# EAGLE board ludusProtoShield_Panel_v10 (EAGLE 7.2.0), part 1 of 3
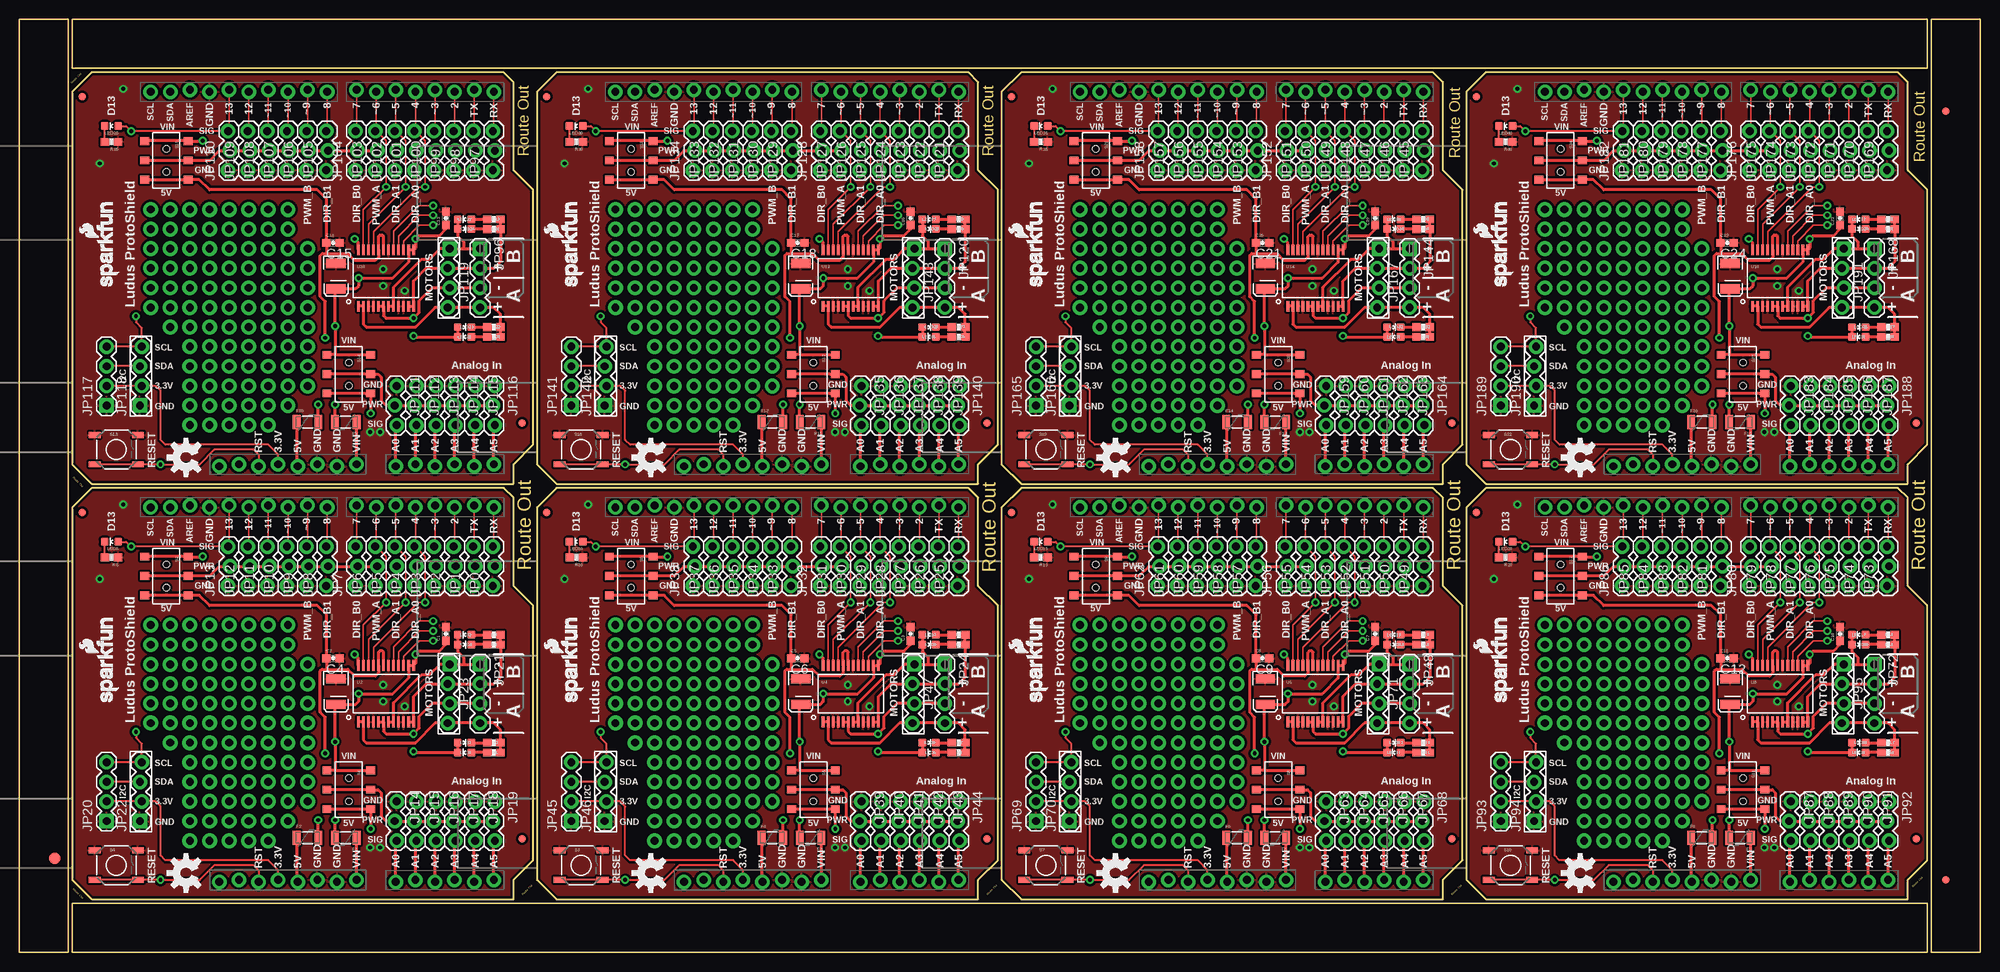
[diagram p0: board, top side]
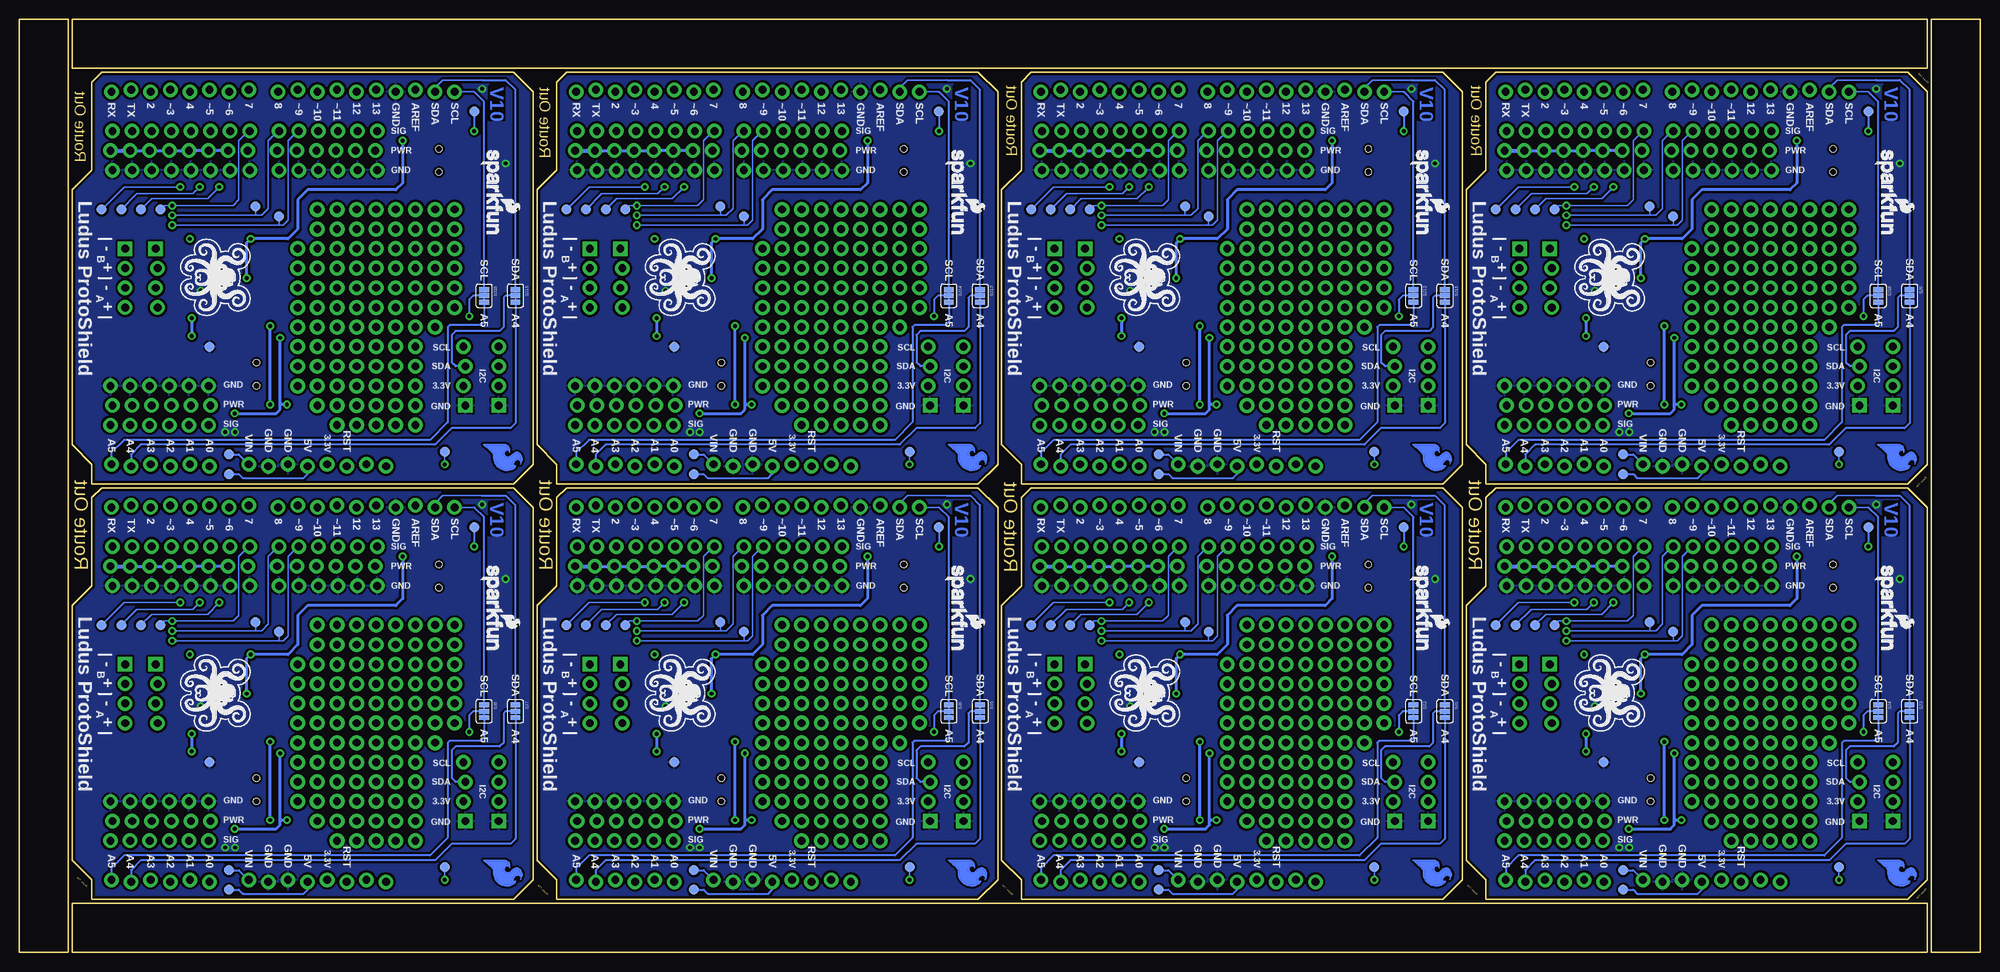
[diagram p1: board, bottom side, seen from below]

Size 254 x 120.9 mm. Coordinates in mm from the lower left corner, seen from the top.
Outline: 6.86,57.66 6.86,9.4 9.4,6.86 64.01,6.86 64.01,9.4 66.55,11.94 66.55,44.96 64.01,47.5 64.01,58.93 62.74,60.2 9.4,60.2 6.86,57.66
Outline: 67.06,57.66 67.06,9.4 69.6,6.86 124.21,6.86 124.21,9.4 126.75,11.94 126.75,44.96 124.21,47.5 124.21,58.93 122.94,60.2 69.6,60.2 67.06,57.66
Outline: 127.25,57.66 127.25,9.4 129.79,6.86 184.4,6.86 184.4,9.4 186.94,11.94 186.94,44.96 184.4,47.5 184.4,58.93 183.13,60.2 129.79,60.2 127.25,57.66
Outline: 187.45,57.66 187.45,9.4 189.99,6.86 244.6,6.86 244.6,9.4 247.14,11.94 247.14,44.96 244.6,47.5 244.6,58.93 243.33,60.2 189.99,60.2 187.45,57.66
Outline: 6.86,111.51 6.86,63.25 9.4,60.71 64.01,60.71 64.01,63.25 66.55,65.79 66.55,98.81 64.01,101.35 64.01,112.78 62.74,114.05 9.4,114.05 6.86,111.51
Outline: 67.06,111.51 67.06,63.25 69.6,60.71 124.21,60.71 124.21,63.25 126.75,65.79 126.75,98.81 124.21,101.35 124.21,112.78 122.94,114.05 69.6,114.05 67.06,111.51
Outline: 127.25,111.51 127.25,63.25 129.79,60.71 184.4,60.71 184.4,63.25 186.94,65.79 186.94,98.81 184.4,101.35 184.4,112.78 183.13,114.05 129.79,114.05 127.25,111.51
Outline: 187.45,111.51 187.45,63.25 189.99,60.71 244.6,60.71 244.6,63.25 247.14,65.79 247.14,98.81 244.6,101.35 244.6,112.78 243.33,114.05 189.99,114.05 187.45,111.51
Outline: 6.35,0 6.35,120.9 0,120.9 0,0 6.35,0
Outline: 6.86,6.35 6.86,0 247.14,0 247.14,6.35 6.86,6.35
Outline: 254,0 254,120.9 247.65,120.9 247.65,0 254,0
Outline: 247.14,114.55 247.14,120.9 6.86,120.9 6.86,114.55 247.14,114.55
Copper layers (1*16): Top 0.035mm / dielectric 1.5mm / Bottom 0.035mm
Design rules "SparkFun-2-layer": minimum track width 7mil, minimum drill 15mil, track to track 8mil, track to pad 8mil, pad to pad 8mil, via to via 8mil, smd to smd 8mil, copper to edge 8mil, drill to drill 8mil, minimum pad ring 12mil, minimum via ring 10mil, stop-mask expansion 4mil, vias tented up to drill 20mil, thermal gap 10mil
Net classes: 1 power: width 0.61 mm

## Footprints (pad centres in the part's own frame; a part is rotated, then mirrored left to right if it is on the bottom)
0603-CAP = smd 1.1 x 1: 1 -0.85,0; 2 0.85,0
EIA3528 = smd 1.2 x 2.5: A 1.65,0; C -1.65,0
FIDUCIAL-1.5X3 = smd 1.5 x 1.5: 1 0,0
FIDUCIAL-1X2 = smd 1 x 1: 1 0,0
PTC-1206 = smd 1 x 1.8: 1 -1.4,0; 2 1.4,0
1X03_LOCK = drill 1.016 pad 1.88: 1 0,0.127; 2 2.54,-0.127; 3 5.08,0.127
1X04 = drill 1.016 pad 1.88 square: 1 0,0 | drill 1.016 pad 1.88: 2 2.54,0; 3 5.08,0; 4 7.62,0
1X04_LOCK = drill 1.016 pad 1.88 square: 1 0,0.127 | drill 1.016 pad 1.88: 2 2.54,-0.127; 3 5.08,0.127; 4 7.62,-0.127
LED-0603 = smd 1 x 1: A 0,-0.877; C 0,0.877
0603-RES = smd 1.1 x 1: 1 -0.85,0; 2 0.85,0
AYZ0202 = smd 1 x 1.15: 1 -2.5,2.825; 2 0,2.825; 3 2.5,2.825; 4 -2.5,-2.825; 5 0,-2.825; 6 2.5,-2.825 | hole 0.85: 1.5,0; -1.5,0
TACTILE-SWITCH-SMD = smd 1.524 x 0.762: 1 -2.794,1.905; 2 2.794,1.905; 3 -2.794,-1.905; 4 2.794,-1.905
PAD-JUMPER-3-3OF3_NC_BY_TRACE_YES_SILK_FULL_BOX = smd 0.635 x 1.27: 1 -0.813,0; 2 0,0; 3 0.813,0
PAD.03X.05 = smd 1.27 x 1.27: P$1 0,0
UNO_R3_SHIELD_NOLABELS_LOCK = drill 1.016 pad 1.88: 3.3V 50.8,26.67; 5V 51.054,29.21; A0 51.054,41.91; A1 50.8,44.45; A2 51.054,46.99; A3 50.8,49.53; A4 51.054,52.07; A5 50.8,54.61; AREF 2.286,15.24; D2 2.54,49.53; D3 2.286,46.99; D4 2.54,44.45; D5 2.286,41.91; D6 2.54,39.37; D7 2.286,36.83; D8 2.54,33.02; D9 2.286,30.48; D10 2.54,27.94; D11 2.286,25.4; D12 2.54,22.86; D13 2.286,20.32; GND@0 50.8,31.75; GND@1 51.054,34.29; GND@2 2.54,17.78; IOREF 50.8,21.59; NC 51.054,19.05; RES 51.054,24.13; RX 2.54,54.61; SCL 2.54,10.16; SDA 2.54,12.7; TX 2.286,52.07; VIN 50.8,36.83
SSOP24 = smd 0.348 x 1.397: 1 -3.575,-3.656; 2 -2.925,-3.656; 3 -2.275,-3.656; 4 -1.625,-3.656; 5 -0.975,-3.656; 6 -0.325,-3.656; 7 0.325,-3.656; 8 0.975,-3.656; 9 1.625,-3.656; 10 2.275,-3.656; 11 2.925,-3.656; 12 3.575,-3.656; 13 3.575,3.656; 14 2.925,3.656; 15 2.275,3.656; 16 1.625,3.656; 17 0.975,3.656; 18 0.325,3.656; 19 -0.325,3.656; 20 -0.975,3.656; 21 -1.625,3.656; 22 -2.275,3.656; 23 -2.925,3.656; 24 -3.575,3.656

## Placement (x,y rotation side)
C1  0.1uF  [0603-CAP]  55.24,41.27 90 top
C2  0.1uF  [0603-CAP]  40.64,38.1 0 top
C3  0.1uF  [0603-CAP]  115.44,41.27 90 top
C4  10uf , 20V  [EIA3528]  41.02,33.78 270 top
C5  0.1uF  [0603-CAP]  100.84,38.1 0 top
C6  10uf , 20V  [EIA3528]  101.22,33.78 270 top
C7  0.1uF  [0603-CAP]  175.64,41.27 90 top
C8  0.1uF  [0603-CAP]  161.04,38.1 0 top
C9  10uf , 20V  [EIA3528]  161.42,33.78 270 top
C10  0.1uF  [0603-CAP]  235.84,41.27 90 top
C11  0.1uF  [0603-CAP]  221.23,38.1 0 top
C12  10uf , 20V  [EIA3528]  221.62,33.78 270 top
C13  0.1uF  [0603-CAP]  55.24,95.12 90 top
C14  0.1uF  [0603-CAP]  40.64,91.95 0 top
C15  10uf , 20V  [EIA3528]  41.02,87.63 270 top
C16  0.1uF  [0603-CAP]  115.44,95.12 90 top
C17  0.1uF  [0603-CAP]  100.84,91.95 0 top
C18  10uf , 20V  [EIA3528]  101.22,87.63 270 top
C19  0.1uF  [0603-CAP]  175.64,95.12 90 top
C20  0.1uF  [0603-CAP]  161.04,91.95 0 top
C21  10uf , 20V  [EIA3528]  161.42,87.63 270 top
C22  0.1uF  [0603-CAP]  235.84,95.12 90 top
C23  0.1uF  [0603-CAP]  221.23,91.95 0 top
C24  10uf , 20V  [EIA3528]  221.62,87.63 270 top
E$1  [FIDUCIAL-1.5X3]  4.57,12.19 0 top
E$4  [FIDUCIAL-1X2]  249.56,9.4 0 top
E$5  [FIDUCIAL-1X2]  249.56,108.97 180 top
F1  [PTC-1206]  42.29,14.86 180 top
F2  [PTC-1206]  37.34,14.86 0 top
F3  [PTC-1206]  102.49,14.86 180 top
F4  [PTC-1206]  97.54,14.86 0 top
F5  [PTC-1206]  162.69,14.86 180 top
F6  [PTC-1206]  157.73,14.86 0 top
F7  [PTC-1206]  222.88,14.86 180 top
F8  [PTC-1206]  217.93,14.86 0 top
F9  [PTC-1206]  42.29,68.71 180 top
F10  [PTC-1206]  37.34,68.71 0 top
F11  [PTC-1206]  102.49,68.71 180 top
F12  [PTC-1206]  97.54,68.71 0 top
F13  [PTC-1206]  162.69,68.71 180 top
F14  [PTC-1206]  157.73,68.71 0 top
F15  [PTC-1206]  222.88,68.71 180 top
F16  [PTC-1206]  217.93,68.71 0 top
FID1  FIDUCIAL1X2  [FIDUCIAL-1X2]  8.13,57.02 0 top
FID2  FIDUCIAL1X2  [FIDUCIAL-1X2]  65.15,14.73 0 top
FID3  FIDUCIAL1X2  [FIDUCIAL-1X2]  68.33,57.02 0 top
FID4  FIDUCIAL1X2  [FIDUCIAL-1X2]  125.35,14.73 0 top
FID5  FIDUCIAL1X2  [FIDUCIAL-1X2]  128.52,57.02 0 top
FID6  FIDUCIAL1X2  [FIDUCIAL-1X2]  185.55,14.73 0 top
FID7  FIDUCIAL1X2  [FIDUCIAL-1X2]  188.72,57.02 0 top
FID8  FIDUCIAL1X2  [FIDUCIAL-1X2]  245.75,14.73 0 top
FID9  FIDUCIAL1X2  [FIDUCIAL-1X2]  8.13,110.87 0 top
FID10  FIDUCIAL1X2  [FIDUCIAL-1X2]  65.15,68.58 0 top
FID11  FIDUCIAL1X2  [FIDUCIAL-1X2]  68.33,110.87 0 top
FID12  FIDUCIAL1X2  [FIDUCIAL-1X2]  125.35,68.58 0 top
FID13  FIDUCIAL1X2  [FIDUCIAL-1X2]  128.52,110.87 0 top
FID14  FIDUCIAL1X2  [FIDUCIAL-1X2]  185.55,68.58 0 top
FID15  FIDUCIAL1X2  [FIDUCIAL-1X2]  188.72,110.87 0 top
FID16  FIDUCIAL1X2  [FIDUCIAL-1X2]  245.75,68.58 0 top
JP0  D0  [1X03_LOCK]  61.47,47.5 90 top
JP1  D1  [1X03_LOCK]  58.93,47.5 90 top
JP2  D2  [1X03_LOCK]  56.39,47.5 90 top
JP3  D3  [1X03_LOCK]  53.85,47.5 90 top
JP4  D4  [1X03_LOCK]  51.31,47.5 90 top
JP5  D5  [1X03_LOCK]  48.77,47.5 90 top
JP6  D6  [1X03_LOCK]  46.23,47.5 90 top
JP7  D7  [1X03_LOCK]  43.69,47.5 90 top
JP8  D8  [1X03_LOCK]  39.88,47.5 90 top
JP9  D9  [1X03_LOCK]  37.34,47.5 90 top
JP10  D10  [1X03_LOCK]  34.8,47.5 90 top
JP11  D11  [1X03_LOCK]  32.26,47.5 90 top
JP12  D12  [1X03_LOCK]  29.72,47.5 90 top
JP13  D13  [1X03_LOCK]  27.18,47.5 90 top
JP14  A0  [1X03_LOCK]  48.77,19.56 270 top
JP15  A1  [1X03_LOCK]  51.31,19.56 270 top
JP16  A2  [1X03_LOCK]  53.85,19.56 270 top
JP17  A3  [1X03_LOCK]  56.39,19.56 270 top
JP18  A4  [1X03_LOCK]  58.93,19.56 270 top
JP19  A5  [1X03_LOCK]  61.47,19.56 270 top
JP20  [1X04]  11.3,17.02 90 top
JP21  [1X04]  59.69,37.34 270 top
JP22  [1X04_LOCK]  15.75,17.02 90 top
JP23  [1X04_LOCK]  55.63,37.34 270 top
JP24  [1X04]  119.89,37.34 270 top
JP25  D0  [1X03_LOCK]  121.67,47.5 90 top
JP26  D1  [1X03_LOCK]  119.13,47.5 90 top
JP27  D2  [1X03_LOCK]  116.59,47.5 90 top
JP28  D3  [1X03_LOCK]  114.05,47.5 90 top
JP29  D4  [1X03_LOCK]  111.51,47.5 90 top
JP30  D5  [1X03_LOCK]  108.97,47.5 90 top
JP31  D6  [1X03_LOCK]  106.43,47.5 90 top
JP32  D7  [1X03_LOCK]  103.89,47.5 90 top
JP33  D8  [1X03_LOCK]  100.08,47.5 90 top
JP34  D9  [1X03_LOCK]  97.54,47.5 90 top
JP35  D10  [1X03_LOCK]  95,47.5 90 top
JP36  D11  [1X03_LOCK]  92.46,47.5 90 top
JP37  D12  [1X03_LOCK]  89.92,47.5 90 top
JP38  D13  [1X03_LOCK]  87.38,47.5 90 top
JP39  A0  [1X03_LOCK]  108.97,19.56 270 top
JP40  A1  [1X03_LOCK]  111.51,19.56 270 top
JP41  A2  [1X03_LOCK]  114.05,19.56 270 top
JP42  A3  [1X03_LOCK]  116.59,19.56 270 top
JP43  A4  [1X03_LOCK]  119.13,19.56 270 top
JP44  A5  [1X03_LOCK]  121.67,19.56 270 top
JP45  [1X04]  71.5,17.02 90 top
JP46  [1X04_LOCK]  75.95,17.02 90 top
JP47  [1X04_LOCK]  115.82,37.34 270 top
JP48  [1X04]  180.09,37.34 270 top
JP49  D0  [1X03_LOCK]  181.86,47.5 90 top
JP50  D1  [1X03_LOCK]  179.32,47.5 90 top
JP51  D2  [1X03_LOCK]  176.78,47.5 90 top
JP52  D3  [1X03_LOCK]  174.24,47.5 90 top
JP53  D4  [1X03_LOCK]  171.7,47.5 90 top
JP54  D5  [1X03_LOCK]  169.16,47.5 90 top
JP55  D6  [1X03_LOCK]  166.62,47.5 90 top
JP56  D7  [1X03_LOCK]  164.08,47.5 90 top
JP57  D8  [1X03_LOCK]  160.27,47.5 90 top
JP58  D9  [1X03_LOCK]  157.73,47.5 90 top
JP59  D10  [1X03_LOCK]  155.19,47.5 90 top
JP60  D11  [1X03_LOCK]  152.65,47.5 90 top
JP61  D12  [1X03_LOCK]  150.11,47.5 90 top
JP62  D13  [1X03_LOCK]  147.57,47.5 90 top
JP63  A0  [1X03_LOCK]  169.16,19.56 270 top
JP64  A1  [1X03_LOCK]  171.7,19.56 270 top
JP65  A2  [1X03_LOCK]  174.24,19.56 270 top
JP66  A3  [1X03_LOCK]  176.78,19.56 270 top
JP67  A4  [1X03_LOCK]  179.32,19.56 270 top
JP68  A5  [1X03_LOCK]  181.86,19.56 270 top
JP69  [1X04]  131.7,17.02 90 top
JP70  [1X04_LOCK]  136.14,17.02 90 top
JP71  [1X04_LOCK]  176.02,37.34 270 top
JP72  [1X04]  240.28,37.34 270 top
JP73  D0  [1X03_LOCK]  242.06,47.5 90 top
JP74  D1  [1X03_LOCK]  239.52,47.5 90 top
JP75  D2  [1X03_LOCK]  236.98,47.5 90 top
JP76  D3  [1X03_LOCK]  234.44,47.5 90 top
JP77  D4  [1X03_LOCK]  231.9,47.5 90 top
JP78  D5  [1X03_LOCK]  229.36,47.5 90 top
JP79  D6  [1X03_LOCK]  226.82,47.5 90 top
JP80  D7  [1X03_LOCK]  224.28,47.5 90 top
JP81  D8  [1X03_LOCK]  220.47,47.5 90 top
JP82  D9  [1X03_LOCK]  217.93,47.5 90 top
JP83  D10  [1X03_LOCK]  215.39,47.5 90 top
JP84  D11  [1X03_LOCK]  212.85,47.5 90 top
JP85  D12  [1X03_LOCK]  210.31,47.5 90 top
JP86  D13  [1X03_LOCK]  207.77,47.5 90 top
JP87  A0  [1X03_LOCK]  229.36,19.56 270 top
JP88  A1  [1X03_LOCK]  231.9,19.56 270 top
JP89  A2  [1X03_LOCK]  234.44,19.56 270 top
JP90  A3  [1X03_LOCK]  236.98,19.56 270 top
JP91  A4  [1X03_LOCK]  239.52,19.56 270 top
JP92  A5  [1X03_LOCK]  242.06,19.56 270 top
JP93  [1X04]  191.9,17.02 90 top
JP94  [1X04_LOCK]  196.34,17.02 90 top
JP95  [1X04_LOCK]  236.22,37.34 270 top
JP96  [1X04]  59.69,91.19 270 top
JP97  D0  [1X03_LOCK]  61.47,101.35 90 top
JP98  D1  [1X03_LOCK]  58.93,101.35 90 top
JP99  D2  [1X03_LOCK]  56.39,101.35 90 top
JP100  D3  [1X03_LOCK]  53.85,101.35 90 top
JP101  D4  [1X03_LOCK]  51.31,101.35 90 top
JP102  D5  [1X03_LOCK]  48.77,101.35 90 top
JP103  D6  [1X03_LOCK]  46.23,101.35 90 top
JP104  D7  [1X03_LOCK]  43.69,101.35 90 top
JP105  D8  [1X03_LOCK]  39.88,101.35 90 top
JP106  D9  [1X03_LOCK]  37.34,101.35 90 top
JP107  D10  [1X03_LOCK]  34.8,101.35 90 top
JP108  D11  [1X03_LOCK]  32.26,101.35 90 top
JP109  D12  [1X03_LOCK]  29.72,101.35 90 top
JP110  D13  [1X03_LOCK]  27.18,101.35 90 top
JP111  A0  [1X03_LOCK]  48.77,73.41 270 top
JP112  A1  [1X03_LOCK]  51.31,73.41 270 top
JP113  A2  [1X03_LOCK]  53.85,73.41 270 top
JP114  A3  [1X03_LOCK]  56.39,73.41 270 top
JP115  A4  [1X03_LOCK]  58.93,73.41 270 top
JP116  A5  [1X03_LOCK]  61.47,73.41 270 top
JP117  [1X04]  11.3,70.87 90 top
JP118  [1X04_LOCK]  15.75,70.87 90 top
JP119  [1X04_LOCK]  55.63,91.19 270 top
JP120  [1X04]  119.89,91.19 270 top
JP121  D0  [1X03_LOCK]  121.67,101.35 90 top
JP122  D1  [1X03_LOCK]  119.13,101.35 90 top
JP123  D2  [1X03_LOCK]  116.59,101.35 90 top
JP124  D3  [1X03_LOCK]  114.05,101.35 90 top
JP125  D4  [1X03_LOCK]  111.51,101.35 90 top
JP126  D5  [1X03_LOCK]  108.97,101.35 90 top
JP127  D6  [1X03_LOCK]  106.43,101.35 90 top
JP128  D7  [1X03_LOCK]  103.89,101.35 90 top
JP129  D8  [1X03_LOCK]  100.08,101.35 90 top
JP130  D9  [1X03_LOCK]  97.54,101.35 90 top
JP131  D10  [1X03_LOCK]  95,101.35 90 top
JP132  D11  [1X03_LOCK]  92.46,101.35 90 top
JP133  D12  [1X03_LOCK]  89.92,101.35 90 top
JP134  D13  [1X03_LOCK]  87.38,101.35 90 top
JP135  A0  [1X03_LOCK]  108.97,73.41 270 top
JP136  A1  [1X03_LOCK]  111.51,73.41 270 top
JP137  A2  [1X03_LOCK]  114.05,73.41 270 top
JP138  A3  [1X03_LOCK]  116.59,73.41 270 top
JP139  A4  [1X03_LOCK]  119.13,73.41 270 top
JP140  A5  [1X03_LOCK]  121.67,73.41 270 top
JP141  [1X04]  71.5,70.87 90 top
JP142  [1X04_LOCK]  75.95,70.87 90 top
JP143  [1X04_LOCK]  115.82,91.19 270 top
JP144  [1X04]  180.09,91.19 270 top
JP145  D0  [1X03_LOCK]  181.86,101.35 90 top
JP146  D1  [1X03_LOCK]  179.32,101.35 90 top
JP147  D2  [1X03_LOCK]  176.78,101.35 90 top
JP148  D3  [1X03_LOCK]  174.24,101.35 90 top
JP149  D4  [1X03_LOCK]  171.7,101.35 90 top
JP150  D5  [1X03_LOCK]  169.16,101.35 90 top
JP151  D6  [1X03_LOCK]  166.62,101.35 90 top
JP152  D7  [1X03_LOCK]  164.08,101.35 90 top
JP153  D8  [1X03_LOCK]  160.27,101.35 90 top
JP154  D9  [1X03_LOCK]  157.73,101.35 90 top
JP155  D10  [1X03_LOCK]  155.19,101.35 90 top
JP156  D11  [1X03_LOCK]  152.65,101.35 90 top
JP157  D12  [1X03_LOCK]  150.11,101.35 90 top
JP158  D13  [1X03_LOCK]  147.57,101.35 90 top
JP159  A0  [1X03_LOCK]  169.16,73.41 270 top
JP160  A1  [1X03_LOCK]  171.7,73.41 270 top
JP161  A2  [1X03_LOCK]  174.24,73.41 270 top
JP162  A3  [1X03_LOCK]  176.78,73.41 270 top
JP163  A4  [1X03_LOCK]  179.32,73.41 270 top
JP164  A5  [1X03_LOCK]  181.86,73.41 270 top
JP165  [1X04]  131.7,70.87 90 top
JP166  [1X04_LOCK]  136.14,70.87 90 top
JP167  [1X04_LOCK]  176.02,91.19 270 top
JP168  [1X04]  240.28,91.19 270 top
JP169  D0  [1X03_LOCK]  242.06,101.35 90 top
JP170  D1  [1X03_LOCK]  239.52,101.35 90 top
JP171  D2  [1X03_LOCK]  236.98,101.35 90 top
JP172  D3  [1X03_LOCK]  234.44,101.35 90 top
JP173  D4  [1X03_LOCK]  231.9,101.35 90 top
JP174  D5  [1X03_LOCK]  229.36,101.35 90 top
JP175  D6  [1X03_LOCK]  226.82,101.35 90 top
JP176  D7  [1X03_LOCK]  224.28,101.35 90 top
JP177  D8  [1X03_LOCK]  220.47,101.35 90 top
JP178  D9  [1X03_LOCK]  217.93,101.35 90 top
JP179  D10  [1X03_LOCK]  215.39,101.35 90 top
JP180  D11  [1X03_LOCK]  212.85,101.35 90 top
JP181  D12  [1X03_LOCK]  210.31,101.35 90 top
JP182  D13  [1X03_LOCK]  207.77,101.35 90 top
JP183  A0  [1X03_LOCK]  229.36,73.41 270 top
JP184  A1  [1X03_LOCK]  231.9,73.41 270 top
JP185  A2  [1X03_LOCK]  234.44,73.41 270 top
JP186  A3  [1X03_LOCK]  236.98,73.41 270 top
JP187  A4  [1X03_LOCK]  239.52,73.41 270 top
JP188  A5  [1X03_LOCK]  242.06,73.41 270 top
JP189  [1X04]  191.9,70.87 90 top
JP190  [1X04_LOCK]  196.34,70.87 90 top
JP191  [1X04_LOCK]  236.22,91.19 270 top
LED1  Yellow  [LED-0603]  57.66,25.91 90 top
LED2  Yellow  [LED-0603]  57.66,41.15 90 top
LED3  BLUE  [LED-0603]  57.66,27.18 270 top
LED4  BLUE  [LED-0603]  57.66,39.88 270 top
LED5  BLUE  [LED-0603]  11.94,53.21 90 top
LED6  Yellow  [LED-0603]  117.86,25.91 90 top
LED7  Yellow  [LED-0603]  117.86,41.15 90 top
LED8  BLUE  [LED-0603]  117.86,27.18 270 top
LED9  BLUE  [LED-0603]  117.86,39.88 270 top
LED10  BLUE  [LED-0603]  72.14,53.21 90 top
LED11  Yellow  [LED-0603]  178.05,25.91 90 top
LED12  Yellow  [LED-0603]  178.05,41.15 90 top
LED13  BLUE  [LED-0603]  178.05,27.18 270 top
LED14  BLUE  [LED-0603]  178.05,39.88 270 top
LED15  BLUE  [LED-0603]  132.33,53.21 90 top
LED16  Yellow  [LED-0603]  238.25,25.91 90 top
LED17  Yellow  [LED-0603]  238.25,41.15 90 top
LED18  BLUE  [LED-0603]  238.25,27.18 270 top
LED19  BLUE  [LED-0603]  238.25,39.88 270 top
LED20  BLUE  [LED-0603]  192.53,53.21 90 top
LED21  Yellow  [LED-0603]  57.66,79.76 90 top
LED22  Yellow  [LED-0603]  57.66,95 90 top
LED23  BLUE  [LED-0603]  57.66,81.03 270 top
LED24  BLUE  [LED-0603]  57.66,93.73 270 top
LED25  BLUE  [LED-0603]  11.94,107.06 90 top
LED26  Yellow  [LED-0603]  117.86,79.76 90 top
LED27  Yellow  [LED-0603]  117.86,95 90 top
LED28  BLUE  [LED-0603]  117.86,81.03 270 top
LED29  BLUE  [LED-0603]  117.86,93.73 270 top
LED30  BLUE  [LED-0603]  72.14,107.06 90 top
LED31  Yellow  [LED-0603]  178.05,79.76 90 top
LED32  Yellow  [LED-0603]  178.05,95 90 top
LED33  BLUE  [LED-0603]  178.05,81.03 270 top
LED34  BLUE  [LED-0603]  178.05,93.73 270 top
LED35  BLUE  [LED-0603]  132.33,107.06 90 top
LED36  Yellow  [LED-0603]  238.25,79.76 90 top
LED37  Yellow  [LED-0603]  238.25,95 90 top
LED38  BLUE  [LED-0603]  238.25,81.03 270 top
LED39  BLUE  [LED-0603]  238.25,93.73 270 top
LED40  BLUE  [LED-0603]  192.53,107.06 90 top
LOGO1  OSHW-LOGOM  [OSHW-LOGO-M]  21.59,10.29 90 top
LOGO2  SFE_LOGO_NAME_FLAME.1_INCH  [SFE_LOGO_NAME_FLAME_.1]  12.95,32 90 top
LOGO3  SFE_LOGO_FLAME.2COP  [SFE_LOGO_FLAME_COPPER_.2]  13.59,12.32 270 bottom
LOGO4  SFE_LOGO_NAME_FLAME.1_INCH  [SFE_LOGO_NAME_FLAME_.1]  13.72,50.55 270 bottom
LOGO5  OSHW-LOGOM  [OSHW-LOGO-M]  81.79,10.29 90 top
LOGO6  SFE_LOGO_NAME_FLAME.1_INCH  [SFE_LOGO_NAME_FLAME_.1]  73.15,32 90 top
LOGO7  SFE_LOGO_NAME_FLAME.1_INCH  [SFE_LOGO_NAME_FLAME_.1]  73.91,50.55 270 bottom
LOGO8  SFE_LOGO_FLAME.2COP  [SFE_LOGO_FLAME_COPPER_.2]  73.79,12.32 270 bottom
LOGO9  OSHW-LOGOM  [OSHW-LOGO-M]  141.99,10.29 90 top
LOGO10  SFE_LOGO_NAME_FLAME.1_INCH  [SFE_LOGO_NAME_FLAME_.1]  133.35,32 90 top
LOGO11  SFE_LOGO_NAME_FLAME.1_INCH  [SFE_LOGO_NAME_FLAME_.1]  134.11,50.55 270 bottom
LOGO12  SFE_LOGO_FLAME.2COP  [SFE_LOGO_FLAME_COPPER_.2]  133.99,12.32 270 bottom
LOGO13  OSHW-LOGOM  [OSHW-LOGO-M]  202.18,10.29 90 top
LOGO14  SFE_LOGO_NAME_FLAME.1_INCH  [SFE_LOGO_NAME_FLAME_.1]  193.55,32 90 top
LOGO15  SFE_LOGO_NAME_FLAME.1_INCH  [SFE_LOGO_NAME_FLAME_.1]  194.31,50.55 270 bottom
LOGO16  SFE_LOGO_FLAME.2COP  [SFE_LOGO_FLAME_COPPER_.2]  194.18,12.32 270 bottom
LOGO17  OSHW-LOGOM  [OSHW-LOGO-M]  21.59,64.14 90 top
LOGO18  SFE_LOGO_NAME_FLAME.1_INCH  [SFE_LOGO_NAME_FLAME_.1]  12.95,85.85 90 top
LOGO19  SFE_LOGO_NAME_FLAME.1_INCH  [SFE_LOGO_NAME_FLAME_.1]  13.72,104.39 270 bottom
LOGO20  SFE_LOGO_FLAME.2COP  [SFE_LOGO_FLAME_COPPER_.2]  13.59,66.17 270 bottom
LOGO21  OSHW-LOGOM  [OSHW-LOGO-M]  81.79,64.14 90 top
LOGO22  SFE_LOGO_NAME_FLAME.1_INCH  [SFE_LOGO_NAME_FLAME_.1]  73.15,85.85 90 top
LOGO23  SFE_LOGO_NAME_FLAME.1_INCH  [SFE_LOGO_NAME_FLAME_.1]  73.91,104.39 270 bottom
LOGO24  SFE_LOGO_FLAME.2COP  [SFE_LOGO_FLAME_COPPER_.2]  73.79,66.17 270 bottom
LOGO25  OSHW-LOGOM  [OSHW-LOGO-M]  141.99,64.14 90 top
LOGO26  SFE_LOGO_NAME_FLAME.1_INCH  [SFE_LOGO_NAME_FLAME_.1]  133.35,85.85 90 top
LOGO27  SFE_LOGO_NAME_FLAME.1_INCH  [SFE_LOGO_NAME_FLAME_.1]  134.11,104.39 270 bottom
LOGO28  SFE_LOGO_FLAME.2COP  [SFE_LOGO_FLAME_COPPER_.2]  133.99,66.17 270 bottom
LOGO29  OSHW-LOGOM  [OSHW-LOGO-M]  202.18,64.14 90 top
LOGO30  SFE_LOGO_NAME_FLAME.1_INCH  [SFE_LOGO_NAME_FLAME_.1]  193.55,85.85 90 top
LOGO31  SFE_LOGO_NAME_FLAME.1_INCH  [SFE_LOGO_NAME_FLAME_.1]  194.31,104.39 270 bottom
LOGO32  SFE_LOGO_FLAME.2COP  [SFE_LOGO_FLAME_COPPER_.2]  194.18,66.17 270 bottom
R1  1K  [0603-RES]  61.47,25.91 0 top
R2  1K  [0603-RES]  61.47,27.18 0 top
R3  1K  [0603-RES]  61.47,41.15 0 top
R4  1K  [0603-RES]  61.47,39.88 0 top
R5  330  [0603-RES]  11.94,51.18 180 top
R6  1K  [0603-RES]  121.67,25.91 0 top
R7  1K  [0603-RES]  121.67,27.18 0 top
R8  1K  [0603-RES]  121.67,41.15 0 top
R9  1K  [0603-RES]  121.67,39.88 0 top
R10  330  [0603-RES]  72.14,51.18 180 top
R11  1K  [0603-RES]  181.86,25.91 0 top
R12  1K  [0603-RES]  181.86,27.18 0 top
R13  1K  [0603-RES]  181.86,41.15 0 top
R14  1K  [0603-RES]  181.86,39.88 0 top
R15  330  [0603-RES]  132.33,51.18 180 top
R16  1K  [0603-RES]  242.06,25.91 0 top
R17  1K  [0603-RES]  242.06,27.18 0 top
R18  1K  [0603-RES]  242.06,41.15 0 top
R19  1K  [0603-RES]  242.06,39.88 0 top
R20  330  [0603-RES]  192.53,51.18 180 top
R21  1K  [0603-RES]  61.47,79.76 0 top
R22  1K  [0603-RES]  61.47,81.03 0 top
R23  1K  [0603-RES]  61.47,95 0 top
R24  1K  [0603-RES]  61.47,93.73 0 top
R25  330  [0603-RES]  11.94,105.03 180 top
R26  1K  [0603-RES]  121.67,79.76 0 top
R27  1K  [0603-RES]  121.67,81.03 0 top
R28  1K  [0603-RES]  121.67,95 0 top
R29  1K  [0603-RES]  121.67,93.73 0 top
R30  330  [0603-RES]  72.14,105.03 180 top
R31  1K  [0603-RES]  181.86,79.76 0 top
R32  1K  [0603-RES]  181.86,81.03 0 top
R33  1K  [0603-RES]  181.86,95 0 top
R34  1K  [0603-RES]  181.86,93.73 0 top
R35  330  [0603-RES]  132.33,105.03 180 top
R36  1K  [0603-RES]  242.06,79.76 0 top
R37  1K  [0603-RES]  242.06,81.03 0 top
R38  1K  [0603-RES]  242.06,95 0 top
R39  1K  [0603-RES]  242.06,93.73 0 top
R40  330  [0603-RES]  192.53,105.03 180 top
S1  [AYZ0202]  42.67,21.08 270 top
S2  [AYZ0202]  19.05,48.77 270 top
S3  RESET  [TACTILE-SWITCH-SMD]  72.77,11.3 0 top
S4  RESET  [TACTILE-SWITCH-SMD]  12.57,11.3 0 top
S5  [AYZ0202]  102.87,21.08 270 top
S6  [AYZ0202]  79.25,48.77 270 top
S7  RESET  [TACTILE-SWITCH-SMD]  132.97,11.3 0 top
S8  [AYZ0202]  163.07,21.08 270 top
S9  [AYZ0202]  139.45,48.77 270 top
S10  RESET  [TACTILE-SWITCH-SMD]  193.17,11.3 0 top
S11  [AYZ0202]  223.27,21.08 270 top
S12  [AYZ0202]  199.64,48.77 270 top
S13  RESET  [TACTILE-SWITCH-SMD]  12.57,65.15 0 top
S14  [AYZ0202]  42.67,74.93 270 top
S15  [AYZ0202]  19.05,102.62 270 top
S16  RESET  [TACTILE-SWITCH-SMD]  72.77,65.15 0 top
S17  [AYZ0202]  102.87,74.93 270 top
S18  [AYZ0202]  79.25,102.62 270 top
S19  RESET  [TACTILE-SWITCH-SMD]  132.97,65.15 0 top
S20  [AYZ0202]  163.07,74.93 270 top
S21  [AYZ0202]  139.45,102.62 270 top
S22  RESET  [TACTILE-SWITCH-SMD]  193.17,65.15 0 top
S23  [AYZ0202]  223.27,74.93 270 top
S24  [AYZ0202]  199.64,102.62 270 top
SJ1  [PAD-JUMPER-3-3OF3_NC_BY_TRACE_YES_SILK_FULL_BOX]  69.34,31.24 270 bottom
SJ2  [PAD-JUMPER-3-3OF3_NC_BY_TRACE_YES_SILK_FULL_BOX]  73.41,31.24 270 bottom
SJ3  [PAD-JUMPER-3-3OF3_NC_BY_TRACE_YES_SILK_FULL_BOX]  9.14,31.24 270 bottom
SJ4  [PAD-JUMPER-3-3OF3_NC_BY_TRACE_YES_SILK_FULL_BOX]  13.21,31.24 270 bottom
SJ5  [PAD-JUMPER-3-3OF3_NC_BY_TRACE_YES_SILK_FULL_BOX]  129.54,31.24 270 bottom
SJ6  [PAD-JUMPER-3-3OF3_NC_BY_TRACE_YES_SILK_FULL_BOX]  133.6,31.24 270 bottom
SJ7  [PAD-JUMPER-3-3OF3_NC_BY_TRACE_YES_SILK_FULL_BOX]  189.74,31.24 270 bottom
SJ8  [PAD-JUMPER-3-3OF3_NC_BY_TRACE_YES_SILK_FULL_BOX]  193.8,31.24 270 bottom
SJ9  [PAD-JUMPER-3-3OF3_NC_BY_TRACE_YES_SILK_FULL_BOX]  9.14,85.09 270 bottom
SJ10  [PAD-JUMPER-3-3OF3_NC_BY_TRACE_YES_SILK_FULL_BOX]  13.21,85.09 270 bottom
SJ11  [PAD-JUMPER-3-3OF3_NC_BY_TRACE_YES_SILK_FULL_BOX]  69.34,85.09 270 bottom
SJ12  [PAD-JUMPER-3-3OF3_NC_BY_TRACE_YES_SILK_FULL_BOX]  73.41,85.09 270 bottom
SJ13  [PAD-JUMPER-3-3OF3_NC_BY_TRACE_YES_SILK_FULL_BOX]  129.54,85.09 270 bottom
SJ14  [PAD-JUMPER-3-3OF3_NC_BY_TRACE_YES_SILK_FULL_BOX]  133.6,85.09 270 bottom
SJ15  [PAD-JUMPER-3-3OF3_NC_BY_TRACE_YES_SILK_FULL_BOX]  189.74,85.09 270 bottom
SJ16  [PAD-JUMPER-3-3OF3_NC_BY_TRACE_YES_SILK_FULL_BOX]  193.8,85.09 270 bottom
TP1  [PAD.03X.05]  62.74,42.42 0 bottom
TP2  [PAD.03X.05]  60.2,42.42 0 bottom
TP3  [PAD.03X.05]  57.66,42.42 0 bottom
TP4  [PAD.03X.05]  55.12,42.42 90 bottom
TP5  [PAD.03X.05]  42.8,42.8 90 bottom
TP6  [PAD.03X.05]  39.75,41.53 90 bottom
TP7  [PAD.03X.05]  14.48,55.12 90 bottom
TP8  [PAD.03X.05]  18.29,11.05 0 bottom
TP9  [PAD.03X.05]  46.23,10.67 90 bottom
TP10  [PAD.03X.05]  46.23,8.13 0 bottom
TP11  [PAD.03X.05]  48.77,24.64 0 bottom
TP12  [PAD.03X.05]  120.4,42.42 0 bottom
TP13  [PAD.03X.05]  122.94,42.42 0 bottom
TP14  [PAD.03X.05]  117.86,42.42 0 bottom
TP15  [PAD.03X.05]  99.95,41.53 90 bottom
TP16  [PAD.03X.05]  115.32,42.42 90 bottom
TP17  [PAD.03X.05]  103,42.8 90 bottom
TP18  [PAD.03X.05]  74.68,55.12 90 bottom
TP19  [PAD.03X.05]  78.49,11.05 0 bottom
TP20  [PAD.03X.05]  106.43,10.67 90 bottom
TP21  [PAD.03X.05]  106.43,8.13 0 bottom
TP22  [PAD.03X.05]  108.97,24.64 0 bottom
TP23  [PAD.03X.05]  180.59,42.42 0 bottom
TP24  [PAD.03X.05]  183.13,42.42 0 bottom
TP25  [PAD.03X.05]  178.05,42.42 0 bottom
TP26  [PAD.03X.05]  160.15,41.53 90 bottom
TP27  [PAD.03X.05]  175.51,42.42 90 bottom
TP28  [PAD.03X.05]  163.19,42.8 90 bottom
TP29  [PAD.03X.05]  134.87,55.12 90 bottom
TP30  [PAD.03X.05]  138.68,11.05 0 bottom
TP31  [PAD.03X.05]  166.62,10.67 90 bottom
TP32  [PAD.03X.05]  166.62,8.13 0 bottom
TP33  [PAD.03X.05]  169.16,24.64 0 bottom
TP34  [PAD.03X.05]  240.79,42.42 0 bottom
TP35  [PAD.03X.05]  243.33,42.42 0 bottom
TP36  [PAD.03X.05]  238.25,42.42 0 bottom
TP37  [PAD.03X.05]  220.34,41.53 90 bottom
TP38  [PAD.03X.05]  235.71,42.42 90 bottom
TP39  [PAD.03X.05]  223.39,42.8 90 bottom
TP40  [PAD.03X.05]  195.07,55.12 90 bottom
TP41  [PAD.03X.05]  198.88,11.05 0 bottom
TP42  [PAD.03X.05]  226.82,10.67 90 bottom
TP43  [PAD.03X.05]  226.82,8.13 0 bottom
TP44  [PAD.03X.05]  229.36,24.64 0 bottom
TP45  [PAD.03X.05]  60.2,96.27 0 bottom
TP46  [PAD.03X.05]  62.74,96.27 0 bottom
TP47  [PAD.03X.05]  57.66,96.27 0 bottom
TP48  [PAD.03X.05]  39.75,95.38 90 bottom
TP49  [PAD.03X.05]  55.12,96.27 90 bottom
TP50  [PAD.03X.05]  42.8,96.65 90 bottom
TP51  [PAD.03X.05]  14.48,108.97 90 bottom
TP52  [PAD.03X.05]  18.29,64.9 0 bottom
TP53  [PAD.03X.05]  46.23,64.52 90 bottom
TP54  [PAD.03X.05]  46.23,61.98 0 bottom
TP55  [PAD.03X.05]  48.77,78.49 0 bottom
TP56  [PAD.03X.05]  120.4,96.27 0 bottom
TP57  [PAD.03X.05]  122.94,96.27 0 bottom
TP58  [PAD.03X.05]  117.86,96.27 0 bottom
TP59  [PAD.03X.05]  99.95,95.38 90 bottom
TP60  [PAD.03X.05]  115.32,96.27 90 bottom
TP61  [PAD.03X.05]  103,96.65 90 bottom
TP62  [PAD.03X.05]  74.68,108.97 90 bottom
TP63  [PAD.03X.05]  78.49,64.9 0 bottom
TP64  [PAD.03X.05]  106.43,64.52 90 bottom
TP65  [PAD.03X.05]  106.43,61.98 0 bottom
TP66  [PAD.03X.05]  108.97,78.49 0 bottom
TP67  [PAD.03X.05]  180.59,96.27 0 bottom
TP68  [PAD.03X.05]  183.13,96.27 0 bottom
TP69  [PAD.03X.05]  178.05,96.27 0 bottom
TP70  [PAD.03X.05]  160.15,95.38 90 bottom
TP71  [PAD.03X.05]  175.51,96.27 90 bottom
TP72  [PAD.03X.05]  163.19,96.65 90 bottom
TP73  [PAD.03X.05]  134.87,108.97 90 bottom
TP74  [PAD.03X.05]  138.68,64.9 0 bottom
TP75  [PAD.03X.05]  166.62,64.52 90 bottom
TP76  [PAD.03X.05]  166.62,61.98 0 bottom
TP77  [PAD.03X.05]  169.16,78.49 0 bottom
TP78  [PAD.03X.05]  240.79,96.27 0 bottom
TP79  [PAD.03X.05]  243.33,96.27 0 bottom
TP80  [PAD.03X.05]  238.25,96.27 0 bottom
TP81  [PAD.03X.05]  220.34,95.38 90 bottom
TP82  [PAD.03X.05]  235.71,96.27 90 bottom
TP83  [PAD.03X.05]  223.39,96.65 90 bottom
TP84  [PAD.03X.05]  195.07,108.97 90 bottom
TP85  [PAD.03X.05]  198.88,64.9 0 bottom
TP86  [PAD.03X.05]  226.82,64.52 90 bottom
TP87  [PAD.03X.05]  226.82,61.98 0 bottom
TP88  [PAD.03X.05]  229.36,78.49 0 bottom
U1  ARDUINO  [UNO_R3_SHIELD_NOLABELS_LOCK]  6.86,60.2 270 top
U2  TB6612FNG  [SSOP24]  47.5,33.53 0 top
U3  ARDUINO  [UNO_R3_SHIELD_NOLABELS_LOCK]  67.06,60.2 270 top
U4  TB6612FNG  [SSOP24]  107.7,33.53 0 top
U5  ARDUINO  [UNO_R3_SHIELD_NOLABELS_LOCK]  127.25,60.2 270 top
U6  TB6612FNG  [SSOP24]  167.89,33.53 0 top
U7  ARDUINO  [UNO_R3_SHIELD_NOLABELS_LOCK]  187.45,60.2 270 top
U8  TB6612FNG  [SSOP24]  228.09,33.53 0 top
U9  ARDUINO  [UNO_R3_SHIELD_NOLABELS_LOCK]  6.86,114.05 270 top
U10  TB6612FNG  [SSOP24]  47.5,87.38 0 top
U11  ARDUINO  [UNO_R3_SHIELD_NOLABELS_LOCK]  67.06,114.05 270 top
U12  TB6612FNG  [SSOP24]  107.7,87.38 0 top
U13  ARDUINO  [UNO_R3_SHIELD_NOLABELS_LOCK]  127.25,114.05 270 top
U14  TB6612FNG  [SSOP24]  167.89,87.38 0 top
U15  ARDUINO  [UNO_R3_SHIELD_NOLABELS_LOCK]  187.45,114.05 270 top
U16  TB6612FNG  [SSOP24]  228.09,87.38 0 top
U$1  SFE_LUDUSSFE_LUDUS-M  [SFE_LUDUS-M]  48.13,33.53 270 bottom
U$2  SFE_LUDUSSFE_LUDUS-M  [SFE_LUDUS-M]  108.33,33.53 270 bottom
U$3  SFE_LUDUSSFE_LUDUS-M  [SFE_LUDUS-M]  168.53,33.53 270 bottom
U$4  SFE_LUDUSSFE_LUDUS-M  [SFE_LUDUS-M]  228.73,33.53 270 bottom
U$5  SFE_LUDUSSFE_LUDUS-M  [SFE_LUDUS-M]  48.13,87.38 270 bottom
U$6  SFE_LUDUSSFE_LUDUS-M  [SFE_LUDUS-M]  108.33,87.38 270 bottom
U$7  SFE_LUDUSSFE_LUDUS-M  [SFE_LUDUS-M]  168.53,87.38 270 bottom
U$8  SFE_LUDUSSFE_LUDUS-M  [SFE_LUDUS-M]  228.73,87.38 270 bottom

## Library data of the parts
C1-C3 C5 C7 C8 C10 C11 C13 C14 C16 C17 C19 C20 C22 C23 = SparkFun-Capacitors; PROD_ID: CAP-08604
C4 C6 C9 C12 C15 C18 C21 C24 = SparkFun-Capacitors; PROD_ID: CAP-08063
E$1 = SparkFun-Retired
E$4 E$5 FID1-FID16 LOGO1-LOGO32 U$1-U$8 = SparkFun-Aesthetics
F1-F16 = SparkFun-PowerIC; PROD_ID: RES-11150
JP0 JP1-JP191 = SparkFun-Connectors
LED1 LED2 LED6 LED7 LED11 LED12 LED16 LED17 LED21 LED22 LED26 LED27 LED31 LED32 LED36 LED37 = SparkFun-LED; PROD_ID: DIO-09003
LED3-LED5 LED8-LED10 LED13-LED15 LED18-LED20 LED23-LED25 LED28-LED30 LED33-LED35 LED38-LED40 = SparkFun-LED; PROD_ID: DIO-08575
R1-R4 R6-R9 R11-R14 R16-R19 R21-R24 R26-R29 R31-R34 R36-R39 = SparkFun-Resistors; PROD_ID: RES-07856
R5 R10 R15 R20 R25 R30 R35 R40 = SparkFun-Resistors; PROD_ID: RES-00818
S1 S2 S5 S6 S8 S9 S11 S12 S14 S15 S17 S18 S20 S21 S23 S24 = SparkFun-Electromechanical; PROD_ID: SWCH-08179
S3 S4 S7 S10 S13 S16 S19 S22 = SparkFun-Electromechanical; PROD_ID: SWCH-08247
SJ1-SJ16 TP1-TP88 = SparkFun-Passives
U1 U3 U5 U7 U9 U11 U13 U15 = SparkFun-Boards
U2 U4 U6 U8 U10 U12 U14 U16 = SparkFun-PowerIC; PROD_ID: IC-09363

## Nets
3.3V: JP20.2 JP22.2 U1.3.3V
3.3V1: JP45.2 JP46.2 U3.3.3V
3.3V2: JP69.2 JP70.2 U5.3.3V
3.3V3: JP93.2 JP94.2 U7.3.3V
3.3V4: JP117.2 JP118.2 U9.3.3V
3.3V5: JP141.2 JP142.2 U11.3.3V
3.3V6: JP165.2 JP166.2 U13.3.3V
3.3V7: JP189.2 JP190.2 U15.3.3V
A0: JP14.3 U1.A0
A1: JP15.3 U1.A1
A2: JP16.3 U1.A2
A3: JP17.3 U1.A3
A4: JP18.3 SJ3.3 U1.A4
A5: JP19.3 SJ4.3 U1.A5
A6: JP44.3 SJ2.3 U3.A5
A7: JP43.3 SJ1.3 U3.A4
A8: JP41.3 U3.A2
A9: JP40.3 U3.A1
A10: JP39.3 U3.A0
A11: JP42.3 U3.A3
A12: JP68.3 SJ6.3 U5.A5
A13: JP67.3 SJ5.3 U5.A4
A14: JP65.3 U5.A2
A15: JP64.3 U5.A1
A16: JP63.3 U5.A0
A17: JP66.3 U5.A3
A18: JP92.3 SJ8.3 U7.A5
A19: JP91.3 SJ7.3 U7.A4
A20: JP89.3 U7.A2
A21: JP88.3 U7.A1
A22: JP87.3 U7.A0
A23: JP90.3 U7.A3
A24: JP116.3 SJ10.3 U9.A5
A25: JP115.3 SJ9.3 U9.A4
A26: JP113.3 U9.A2
A27: JP112.3 U9.A1
A28: JP111.3 U9.A0
A29: JP114.3 U9.A3
A30: JP140.3 SJ12.3 U11.A5
A31: JP139.3 SJ11.3 U11.A4
A32: JP137.3 U11.A2
A33: JP136.3 U11.A1
A34: JP135.3 U11.A0
A35: JP138.3 U11.A3
A36: JP164.3 SJ14.3 U13.A5
A37: JP163.3 SJ13.3 U13.A4
A38: JP161.3 U13.A2
A39: JP160.3 U13.A1
A40: JP159.3 U13.A0
A41: JP162.3 U13.A3
A42: JP188.3 SJ16.3 U15.A5
A43: JP187.3 SJ15.3 U15.A4
A44: JP185.3 U15.A2
A45: JP184.3 U15.A1
A46: JP183.3 U15.A0
A47: JP186.3 U15.A3
AIN1: JP4.3 TP1.P$1 U1.D4 U2.21
AIN2: JP5.3 TP2.P$1 U1.D5 U2.22
AIN3: JP30.3 TP12.P$1 U3.D5 U4.22
AIN4: JP29.3 TP13.P$1 U3.D4 U4.21
AIN5: JP54.3 TP23.P$1 U5.D5 U6.22
AIN6: JP53.3 TP24.P$1 U5.D4 U6.21
AIN7: JP78.3 TP34.P$1 U7.D5 U8.22
AIN8: JP77.3 TP35.P$1 U7.D4 U8.21
AIN9: JP102.3 TP45.P$1 U9.D5 U10.22
AIN10: JP101.3 TP46.P$1 U9.D4 U10.21
AIN11: JP126.3 TP56.P$1 U11.D5 U12.22
AIN12: JP125.3 TP57.P$1 U11.D4 U12.21
AIN13: JP150.3 TP67.P$1 U13.D5 U14.22
AIN14: JP149.3 TP68.P$1 U13.D4 U14.21
AIN15: JP174.3 TP78.P$1 U15.D5 U16.22
AIN16: JP173.3 TP79.P$1 U15.D4 U16.21
ANALOG_PWR_RAIL: JP14.2 JP15.2 JP16.2 JP17.2 JP18.2 JP19.2 S1.2
ANALOG_PWR_RAIL1: JP39.2 JP40.2 JP41.2 JP42.2 JP43.2 JP44.2 S5.2
ANALOG_PWR_RAIL2: JP63.2 JP64.2 JP65.2 JP66.2 JP67.2 JP68.2 S8.2
ANALOG_PWR_RAIL3: JP87.2 JP88.2 JP89.2 JP90.2 JP91.2 JP92.2 S11.2
ANALOG_PWR_RAIL4: JP111.2 JP112.2 JP113.2 JP114.2 JP115.2 JP116.2 S14.2
ANALOG_PWR_RAIL5: JP135.2 JP136.2 JP137.2 JP138.2 JP139.2 JP140.2 S17.2
ANALOG_PWR_RAIL6: JP159.2 JP160.2 JP161.2 JP162.2 JP163.2 JP164.2 S20.2
ANALOG_PWR_RAIL7: JP183.2 JP184.2 JP185.2 JP186.2 JP187.2 JP188.2 S23.2
AOUT1: JP21.4 JP23.4 R1.2 R2.2 U2.1 U2.2
AOUT2: JP21.3 JP23.3 LED1.C LED3.A U2.5 U2.6
AOUT3: JP24.4 JP47.4 R6.2 R7.2 U4.1 U4.2
AOUT4: JP24.3 JP47.3 LED6.C LED8.A U4.5 U4.6
AOUT5: JP48.4 JP71.4 R11.2 R12.2 U6.1 U6.2
AOUT6: JP48.3 JP71.3 LED11.C LED13.A U6.5 U6.6
AOUT7: JP72.4 JP95.4 R16.2 R17.2 U8.1 U8.2
AOUT8: JP72.3 JP95.3 LED16.C LED18.A U8.5 U8.6
AOUT9: JP96.4 JP119.4 R21.2 R22.2 U10.1 U10.2
AOUT10: JP96.3 JP119.3 LED21.C LED23.A U10.5 U10.6
AOUT11: JP120.4 JP143.4 R26.2 R27.2 U12.1 U12.2
AOUT12: JP120.3 JP143.3 LED26.C LED28.A U12.5 U12.6
AOUT13: JP144.4 JP167.4 R31.2 R32.2 U14.1 U14.2
AOUT14: JP144.3 JP167.3 LED31.C LED33.A U14.5 U14.6
AOUT15: JP168.4 JP191.4 R36.2 R37.2 U16.1 U16.2
AOUT16: JP168.3 JP191.3 LED36.C LED38.A U16.5 U16.6
BIN1: JP7.3 TP4.P$1 U1.D7 U2.17
BIN2: JP8.3 TP5.P$1 U1.D8 U2.16
BIN3: JP32.3 TP16.P$1 U3.D7 U4.17
BIN4: JP33.3 TP17.P$1 U3.D8 U4.16
BIN5: JP56.3 TP27.P$1 U5.D7 U6.17
BIN6: JP57.3 TP28.P$1 U5.D8 U6.16
BIN7: JP80.3 TP38.P$1 U7.D7 U8.17
BIN8: JP81.3 TP39.P$1 U7.D8 U8.16
BIN9: JP104.3 TP49.P$1 U9.D7 U10.17
BIN10: JP105.3 TP50.P$1 U9.D8 U10.16
BIN11: JP128.3 TP60.P$1 U11.D7 U12.17
BIN12: JP129.3 TP61.P$1 U11.D8 U12.16
BIN13: JP152.3 TP71.P$1 U13.D7 U14.17
BIN14: JP153.3 TP72.P$1 U13.D8 U14.16
BIN15: JP176.3 TP82.P$1 U15.D7 U16.17
BIN16: JP177.3 TP83.P$1 U15.D8 U16.16
BOUT1: JP21.2 JP23.2 R3.2 R4.2 U2.11 U2.12
BOUT2: JP21.1 JP23.1 LED2.C LED4.A U2.7 U2.8
BOUT3: JP24.1 JP47.1 LED7.C LED9.A U4.7 U4.8
BOUT4: JP24.2 JP47.2 R8.2 R9.2 U4.11 U4.12
BOUT5: JP48.1 JP71.1 LED12.C LED14.A U6.7 U6.8
BOUT6: JP48.2 JP71.2 R13.2 R14.2 U6.11 U6.12
BOUT7: JP72.1 JP95.1 LED17.C LED19.A U8.7 U8.8
BOUT8: JP72.2 JP95.2 R18.2 R19.2 U8.11 U8.12
BOUT9: JP96.1 JP119.1 LED22.C LED24.A U10.7 U10.8
BOUT10: JP96.2 JP119.2 R23.2 R24.2 U10.11 U10.12
BOUT11: JP120.1 JP143.1 LED27.C LED29.A U12.7 U12.8
BOUT12: JP120.2 JP143.2 R28.2 R29.2 U12.11 U12.12
BOUT13: JP144.1 JP167.1 LED32.C LED34.A U14.7 U14.8
BOUT14: JP144.2 JP167.2 R33.2 R34.2 U14.11 U14.12
BOUT15: JP168.1 JP191.1 LED37.C LED39.A U16.7 U16.8
BOUT16: JP168.2 JP191.2 R38.2 R39.2 U16.11 U16.12
D0: JP0.3 U1.RX
D1: JP1.3 U1.TX
D2: JP2.3 U1.D2
D3: JP3.3 U1.D3
D4: JP37.3 U3.D12
D5: JP38.3 LED10.A TP18.P$1 U3.D13
D6: JP35.3 U3.D10
D7: JP27.3 U3.D2
D8: JP36.3 U3.D11
D9: JP25.3 U3.RX
D10: JP10.3 U1.D10
D11: JP11.3 U1.D11
D12: JP12.3 U1.D12
D13: JP13.3 LED5.A TP7.P$1 U1.D13
D14: JP26.3 U3.TX
D15: JP28.3 U3.D3
D16: JP61.3 U5.D12
D17: JP62.3 LED15.A TP29.P$1 U5.D13
D18: JP59.3 U5.D10
D19: JP51.3 U5.D2
D20: JP60.3 U5.D11
D21: JP49.3 U5.RX
D22: JP50.3 U5.TX
D23: JP52.3 U5.D3
D24: JP85.3 U7.D12
D25: JP86.3 LED20.A TP40.P$1 U7.D13
D26: JP83.3 U7.D10
D27: JP75.3 U7.D2
D28: JP84.3 U7.D11
D29: JP73.3 U7.RX
D30: JP74.3 U7.TX
D31: JP76.3 U7.D3
D32: JP109.3 U9.D12
D33: JP110.3 LED25.A TP51.P$1 U9.D13
D34: JP107.3 U9.D10
D35: JP99.3 U9.D2
D36: JP108.3 U9.D11
D37: JP97.3 U9.RX
D38: JP98.3 U9.TX
D39: JP100.3 U9.D3
D40: JP133.3 U11.D12
D41: JP134.3 LED30.A TP62.P$1 U11.D13
D42: JP131.3 U11.D10
D43: JP123.3 U11.D2
D44: JP132.3 U11.D11
D45: JP121.3 U11.RX
D46: JP122.3 U11.TX
D47: JP124.3 U11.D3
D48: JP157.3 U13.D12
D49: JP158.3 LED35.A TP73.P$1 U13.D13
D50: JP155.3 U13.D10
D51: JP147.3 U13.D2
D52: JP156.3 U13.D11
D53: JP145.3 U13.RX
D54: JP146.3 U13.TX
D55: JP148.3 U13.D3
D56: JP181.3 U15.D12
D57: JP182.3 LED40.A TP84.P$1 U15.D13
D58: JP179.3 U15.D10
D59: JP171.3 U15.D2
D60: JP180.3 U15.D11
D61: JP169.3 U15.RX
D62: JP170.3 U15.TX
D63: JP172.3 U15.D3
FUSED_VCC: C2.1 F2.2 S1.3 S2.3 U2.19 U2.20
FUSED_VCC1: C5.1 F4.2 S5.3 S6.3 U4.19 U4.20
FUSED_VCC2: C8.1 F6.2 S8.3 S9.3 U6.19 U6.20
FUSED_VCC3: C11.1 F8.2 S11.3 S12.3 U8.19 U8.20
FUSED_VCC4: C14.1 F10.2 S14.3 S15.3 U10.19 U10.20
FUSED_VCC5: C17.1 F12.2 S17.3 S18.3 U12.19 U12.20
FUSED_VCC6: C20.1 F14.2 S20.3 S21.3 U14.19 U14.20
FUSED_VCC7: C23.1 F16.2 S23.3 S24.3 U16.19 U16.20
FUSED_VIN: C1.1 C4.A F1.2 S1.1 S2.1 U2.13 U2.14 U2.24
FUSED_VIN1: C3.1 C6.A F3.2 S5.1 S6.1 U4.13 U4.14 U4.24
FUSED_VIN2: C7.1 C9.A F5.2 S8.1 S9.1 U6.13 U6.14 U6.24
FUSED_VIN3: C10.1 C12.A F7.2 S11.1 S12.1 U8.13 U8.14 U8.24
FUSED_VIN4: C13.1 C15.A F9.2 S14.1 S15.1 U10.13 U10.14 U10.24
FUSED_VIN5: C16.1 C18.A F11.2 S17.1 S18.1 U12.13 U12.14 U12.24
FUSED_VIN6: C19.1 C21.A F13.2 S20.1 S21.1 U14.13 U14.14 U14.24
FUSED_VIN7: C22.1 C24.A F15.2 S23.1 S24.1 U16.13 U16.14 U16.24
GND: C1.2 C2.2 C4.C JP0.1 JP1.1 JP2.1 JP3.1 JP4.1 JP5.1 JP6.1 JP7.1 JP8.1 JP9.1 JP10.1 JP11.1 JP12.1 JP13.1 JP14.1 JP15.1 JP16.1 JP17.1 JP18.1 JP19.1 JP20.1 JP22.1 R5.1 S4.1 S4.2 TP11.P$1 U1.GND@0 U1.GND@1 U1.GND@2 U2.3 U2.4 U2.9 U2.10 U2.18
GND1: C3.2 C5.2 C6.C JP25.1 JP26.1 JP27.1 JP28.1 JP29.1 JP30.1 JP31.1 JP32.1 JP33.1 JP34.1 JP35.1 JP36.1 JP37.1 JP38.1 JP39.1 JP40.1 JP41.1 JP42.1 JP43.1 JP44.1 JP45.1 JP46.1 R10.1 S3.1 S3.2 TP22.P$1 U3.GND@0 U3.GND@1 U3.GND@2 U4.3 U4.4 U4.9 U4.10 U4.18
GND2: C7.2 C8.2 C9.C JP49.1 JP50.1 JP51.1 JP52.1 JP53.1 JP54.1 JP55.1 JP56.1 JP57.1 JP58.1 JP59.1 JP60.1 JP61.1 JP62.1 JP63.1 JP64.1 JP65.1 JP66.1 JP67.1 JP68.1 JP69.1 JP70.1 R15.1 S7.1 S7.2 TP33.P$1 U5.GND@0 U5.GND@1 U5.GND@2 U6.3 U6.4 U6.9 U6.10 U6.18
GND3: C10.2 C11.2 C12.C JP73.1 JP74.1 JP75.1 JP76.1 JP77.1 JP78.1 JP79.1 JP80.1 JP81.1 JP82.1 JP83.1 JP84.1 JP85.1 JP86.1 JP87.1 JP88.1 JP89.1 JP90.1 JP91.1 JP92.1 JP93.1 JP94.1 R20.1 S10.1 S10.2 TP44.P$1 U7.GND@0 U7.GND@1 U7.GND@2 U8.3 U8.4 U8.9 U8.10 U8.18
GND4: C13.2 C14.2 C15.C JP97.1 JP98.1 JP99.1 JP100.1 JP101.1 JP102.1 JP103.1 JP104.1 JP105.1 JP106.1 JP107.1 JP108.1 JP109.1 JP110.1 JP111.1 JP112.1 JP113.1 JP114.1 JP115.1 JP116.1 JP117.1 JP118.1 R25.1 S13.1 S13.2 TP55.P$1 U9.GND@0 U9.GND@1 U9.GND@2 U10.3 U10.4 U10.9 U10.10 U10.18
GND5: C16.2 C17.2 C18.C JP121.1 JP122.1 JP123.1 JP124.1 JP125.1 JP126.1 JP127.1 JP128.1 JP129.1 JP130.1 JP131.1 JP132.1 JP133.1 JP134.1 JP135.1 JP136.1 JP137.1 JP138.1 JP139.1 JP140.1 JP141.1 JP142.1 R30.1 S16.1 S16.2 TP66.P$1 U11.GND@0 U11.GND@1 U11.GND@2 U12.3 U12.4 U12.9 U12.10 U12.18
GND6: C19.2 C20.2 C21.C JP145.1 JP146.1 JP147.1 JP148.1 JP149.1 JP150.1 JP151.1 JP152.1 JP153.1 JP154.1 JP155.1 JP156.1 JP157.1 JP158.1 JP159.1 JP160.1 JP161.1 JP162.1 JP163.1 JP164.1 JP165.1 JP166.1 R35.1 S19.1 S19.2 TP77.P$1 U13.GND@0 U13.GND@1 U13.GND@2 U14.3 U14.4 U14.9 U14.10 U14.18
GND7: C22.2 C23.2 C24.C JP169.1 JP170.1 JP171.1 JP172.1 JP173.1 JP174.1 JP175.1 JP176.1 JP177.1 JP178.1 JP179.1 JP180.1 JP181.1 JP182.1 JP183.1 JP184.1 JP185.1 JP186.1 JP187.1 JP188.1 JP189.1 JP190.1 R40.1 S22.1 S22.2 TP88.P$1 U15.GND@0 U15.GND@1 U15.GND@2 U16.3 U16.4 U16.9 U16.10 U16.18
N$1: LED5.C R5.2
N$4: LED1.A R1.1
N$5: LED3.C R2.1
N$8: LED2.A R3.1
N$9: LED4.C R4.1
N$44: LED6.A R6.1
N$75: LED8.C R7.1
N$104: LED7.A R8.1
N$105: LED9.C R9.1
N$106: LED10.C R10.2
N$203: LED11.A R11.1
N$204: LED13.C R12.1
N$205: LED12.A R13.1
N$206: LED14.C R14.1
N$207: LED15.C R15.2
N$304: LED16.A R16.1
N$305: LED18.C R17.1
N$306: LED17.A R18.1
N$307: LED19.C R19.1
N$308: LED20.C R20.2
N$405: LED21.A R21.1
N$406: LED23.C R22.1
N$407: LED22.A R23.1
N$408: LED24.C R24.1
N$409: LED25.C R25.2
N$506: LED26.A R26.1
N$507: LED28.C R27.1
N$508: LED27.A R28.1
N$509: LED29.C R29.1
N$510: LED30.C R30.2
N$607: LED31.A R31.1
N$608: LED33.C R32.1
N$609: LED32.A R33.1
N$610: LED34.C R34.1
N$611: LED35.C R35.2
N$708: LED36.A R36.1
N$709: LED38.C R37.1
N$710: LED37.A R38.1
N$711: LED39.C R39.1
N$712: LED40.C R40.2
PWMA: JP6.3 TP3.P$1 U1.D6 U2.23
PWMA1: JP31.3 TP14.P$1 U3.D6 U4.23
PWMA2: JP55.3 TP25.P$1 U5.D6 U6.23
PWMA3: JP79.3 TP36.P$1 U7.D6 U8.23
PWMA4: JP103.3 TP47.P$1 U9.D6 U10.23
PWMA5: JP127.3 TP58.P$1 U11.D6 U12.23
PWMA6: JP151.3 TP69.P$1 U13.D6 U14.23
PWMA7: JP175.3 TP80.P$1 U15.D6 U16.23
PWMB: JP9.3 TP6.P$1 U1.D9 U2.15
PWMB1: JP34.3 TP15.P$1 U3.D9 U4.15
PWMB2: JP58.3 TP26.P$1 U5.D9 U6.15
PWMB3: JP82.3 TP37.P$1 U7.D9 U8.15
PWMB4: JP106.3 TP48.P$1 U9.D9 U10.15
PWMB5: JP130.3 TP59.P$1 U11.D9 U12.15
PWMB6: JP154.3 TP70.P$1 U13.D9 U14.15
PWMB7: JP178.3 TP81.P$1 U15.D9 U16.15
PWR_RAIL: JP0.2 JP1.2 JP2.2 JP3.2 JP4.2 JP5.2 JP6.2 JP7.2 JP8.2 JP9.2 JP10.2 JP11.2 JP12.2 JP13.2 S2.2
PWR_RAIL1: JP25.2 JP26.2 JP27.2 JP28.2 JP29.2 JP30.2 JP31.2 JP32.2 JP33.2 JP34.2 JP35.2 JP36.2 JP37.2 JP38.2 S6.2
PWR_RAIL2: JP49.2 JP50.2 JP51.2 JP52.2 JP53.2 JP54.2 JP55.2 JP56.2 JP57.2 JP58.2 JP59.2 JP60.2 JP61.2 JP62.2 S9.2
PWR_RAIL3: JP73.2 JP74.2 JP75.2 JP76.2 JP77.2 JP78.2 JP79.2 JP80.2 JP81.2 JP82.2 JP83.2 JP84.2 JP85.2 JP86.2 S12.2
PWR_RAIL4: JP97.2 JP98.2 JP99.2 JP100.2 JP101.2 JP102.2 JP103.2 JP104.2 JP105.2 JP106.2 JP107.2 JP108.2 JP109.2 JP110.2 S15.2
PWR_RAIL5: JP121.2 JP122.2 JP123.2 JP124.2 JP125.2 JP126.2 JP127.2 JP128.2 JP129.2 JP130.2 JP131.2 JP132.2 JP133.2 JP134.2 S18.2
PWR_RAIL6: JP145.2 JP146.2 JP147.2 JP148.2 JP149.2 JP150.2 JP151.2 JP152.2 JP153.2 JP154.2 JP155.2 JP156.2 JP157.2 JP158.2 S21.2
PWR_RAIL7: JP169.2 JP170.2 JP171.2 JP172.2 JP173.2 JP174.2 JP175.2 JP176.2 JP177.2 JP178.2 JP179.2 JP180.2 JP181.2 JP182.2 S24.2
RESET: S4.3 S4.4 TP8.P$1 U1.RES
RESET1: S3.3 S3.4 TP19.P$1 U3.RES
RESET2: S7.3 S7.4 TP30.P$1 U5.RES
RESET3: S10.3 S10.4 TP41.P$1 U7.RES
RESET4: S13.3 S13.4 TP52.P$1 U9.RES
RESET5: S16.3 S16.4 TP63.P$1 U11.RES
RESET6: S19.3 S19.4 TP74.P$1 U13.RES
RESET7: S22.3 S22.4 TP85.P$1 U15.RES
SCL: SJ4.1 U1.SCL
SCL1: SJ2.1 U3.SCL
SCL2: SJ6.1 U5.SCL
SCL3: SJ8.1 U7.SCL
SCL4: SJ10.1 U9.SCL
SCL5: SJ12.1 U11.SCL
SCL6: SJ14.1 U13.SCL
SCL7: SJ16.1 U15.SCL
SCL_I2C_PORT: JP20.4 JP22.4 SJ4.2
SCL_I2C_PORT1: JP45.4 JP46.4 SJ2.2
SCL_I2C_PORT2: JP69.4 JP70.4 SJ6.2
SCL_I2C_PORT3: JP93.4 JP94.4 SJ8.2
SCL_I2C_PORT4: JP117.4 JP118.4 SJ10.2
SCL_I2C_PORT5: JP141.4 JP142.4 SJ12.2
SCL_I2C_PORT6: JP165.4 JP166.4 SJ14.2
SCL_I2C_PORT7: JP189.4 JP190.4 SJ16.2
SDA: SJ3.1 U1.SDA
SDA1: SJ1.1 U3.SDA
SDA2: SJ5.1 U5.SDA
SDA3: SJ7.1 U7.SDA
SDA4: SJ9.1 U9.SDA
SDA5: SJ11.1 U11.SDA
SDA6: SJ13.1 U13.SDA
SDA7: SJ15.1 U15.SDA
SDA_I2C_PORT: JP20.3 JP22.3 SJ3.2
SDA_I2C_PORT1: JP45.3 JP46.3 SJ1.2
SDA_I2C_PORT2: JP69.3 JP70.3 SJ5.2
SDA_I2C_PORT3: JP93.3 JP94.3 SJ7.2
SDA_I2C_PORT4: JP117.3 JP118.3 SJ9.2
SDA_I2C_PORT5: JP141.3 JP142.3 SJ11.2
SDA_I2C_PORT6: JP165.3 JP166.3 SJ13.2
SDA_I2C_PORT7: JP189.3 JP190.3 SJ15.2
VCC: F2.1 TP10.P$1 U1.5V
VCC1: F4.1 TP21.P$1 U3.5V
VCC2: F6.1 TP32.P$1 U5.5V
VCC3: F8.1 TP43.P$1 U7.5V
VCC4: F10.1 TP54.P$1 U9.5V
VCC5: F12.1 TP65.P$1 U11.5V
VCC6: F14.1 TP76.P$1 U13.5V
VCC7: F16.1 TP87.P$1 U15.5V
VIN: F1.1 TP9.P$1 U1.VIN
VIN1: F3.1 TP20.P$1 U3.VIN
VIN2: F5.1 TP31.P$1 U5.VIN
VIN3: F7.1 TP42.P$1 U7.VIN
VIN4: F9.1 TP53.P$1 U9.VIN
VIN5: F11.1 TP64.P$1 U11.VIN
VIN6: F13.1 TP75.P$1 U13.VIN
VIN7: F15.1 TP86.P$1 U15.VIN

## Tracks (layer width: path | path; a pad name or v marks a point on that pad's centre or on a via)
3.3V
  Top 0.254: U1.3.3V 33.53,10.67 32.26,11.94 18.92,11.94 18.29,12.57 18.29,18.92 17.65,19.56 JP22.2 JP20.2
3.3V1
  Top 0.254: U3.3.3V 93.73,10.67 92.46,11.94 79.12,11.94 78.49,12.57 78.49,18.92 77.85,19.56 JP46.2 JP45.2
3.3V2
  Top 0.254: U5.3.3V 153.92,10.67 152.65,11.94 139.32,11.94 138.68,12.57 138.68,18.92 138.05,19.56 JP70.2 JP69.2
3.3V3
  Top 0.254: U7.3.3V 214.12,10.67 212.85,11.94 199.52,11.94 198.88,12.57 198.88,18.92 198.25,19.56 JP94.2 JP93.2
3.3V4
  Top 0.254: U9.3.3V 33.53,64.52 32.26,65.79 18.92,65.79 18.29,66.42 18.29,72.77 17.65,73.41 JP118.2 JP117.2
3.3V5
  Top 0.254: U11.3.3V 93.73,64.52 92.46,65.79 79.12,65.79 78.49,66.42 78.49,72.77 77.85,73.41 JP142.2 JP141.2
3.3V6
  Top 0.254: U13.3.3V 153.92,64.52 152.65,65.79 139.32,65.79 138.68,66.42 138.68,72.77 138.05,73.41 JP166.2 JP165.2
3.3V7
  Top 0.254: U15.3.3V 214.12,64.52 212.85,65.79 199.52,65.79 198.88,66.42 198.88,72.77 198.25,73.41 JP190.2 JP189.2
A0
  Top 0.406: U1.A0 48.77,14.35 JP14.3
A1
  Top 0.406: U1.A1 51.31,14.35 JP15.3
A2
  Top 0.406: U1.A2 53.85,14.35 JP16.3
A3
  Top 0.406: U1.A3 56.39,14.35 JP17.3
A4
  Top 0.406: U1.A4 58.93,14.35 JP18.3
  Bottom 0.254: U1.A4 58.93,10.67 57.66,11.94 19.56,11.94 17.4,14.1 9.78,14.1 9.14,14.73 SJ3.3
A5
  Top 0.406: U1.A5 61.47,14.35 JP19.3
  Bottom 0.254: U1.A5 61.47,10.92 59.82,12.57 20.19,12.57 17.91,14.86 17.91,27.18 17.65,27.43 13.59,27.43 13.21,27.81 SJ4.3
A6
  Top 0.406: U3.A5 121.67,14.35 JP44.3
  Bottom 0.254: U3.A5 121.67,10.92 120.02,12.57 80.39,12.57 78.11,14.86 78.11,27.18 77.85,27.43 73.79,27.43 73.41,27.81 SJ2.3
A7
  Top 0.406: U3.A4 119.13,14.35 JP43.3
  Bottom 0.254: U3.A4 119.13,10.67 117.86,11.94 79.76,11.94 77.6,14.1 69.98,14.1 69.34,14.73 SJ1.3
A8
  Top 0.406: U3.A2 114.05,14.35 JP41.3
A9
  Top 0.406: U3.A1 111.51,14.35 JP40.3
A10
  Top 0.406: U3.A0 108.97,14.35 JP39.3
A11
  Top 0.406: U3.A3 116.59,14.35 JP42.3
A12
  Top 0.406: U5.A5 181.86,14.35 JP68.3
  Bottom 0.254: U5.A5 181.86,10.92 180.21,12.57 140.59,12.57 138.3,14.86 138.3,27.18 138.05,27.43 133.99,27.43 133.6,27.81 SJ6.3
A13
  Top 0.406: U5.A4 179.32,14.35 JP67.3
  Bottom 0.254: U5.A4 179.32,10.67 178.05,11.94 139.95,11.94 137.79,14.1 130.18,14.1 129.54,14.73 SJ5.3
A14
  Top 0.406: U5.A2 174.24,14.35 JP65.3
A15
  Top 0.406: U5.A1 171.7,14.35 JP64.3
A16
  Top 0.406: U5.A0 169.16,14.35 JP63.3
A17
  Top 0.406: U5.A3 176.78,14.35 JP66.3
A18
  Top 0.406: U7.A5 242.06,14.35 JP92.3
  Bottom 0.254: U7.A5 242.06,10.92 240.41,12.57 200.79,12.57 198.5,14.86 198.5,27.18 198.25,27.43 194.18,27.43 193.8,27.81 SJ8.3
A19
  Top 0.406: U7.A4 239.52,14.35 JP91.3
  Bottom 0.254: U7.A4 239.52,10.67 238.25,11.94 200.15,11.94 197.99,14.1 190.37,14.1 189.74,14.73 SJ7.3
A20
  Top 0.406: U7.A2 234.44,14.35 JP89.3
A21
  Top 0.406: U7.A1 231.9,14.35 JP88.3
A22
  Top 0.406: U7.A0 229.36,14.35 JP87.3
A23
  Top 0.406: U7.A3 236.98,14.35 JP90.3
A24
  Top 0.406: U9.A5 61.47,68.2 JP116.3
  Bottom 0.254: U9.A5 61.47,64.77 59.82,66.42 20.19,66.42 17.91,68.71 17.91,81.03 17.65,81.28 13.59,81.28 13.21,81.66 SJ10.3
A25
  Top 0.406: U9.A4 58.93,68.2 JP115.3
  Bottom 0.254: U9.A4 58.93,64.52 57.66,65.79 19.56,65.79 17.4,67.94 9.78,67.94 9.14,68.58 SJ9.3
A26
  Top 0.406: U9.A2 53.85,68.2 JP113.3
A27
  Top 0.406: U9.A1 51.31,68.2 JP112.3
A28
  Top 0.406: U9.A0 48.77,68.2 JP111.3
A29
  Top 0.406: U9.A3 56.39,68.2 JP114.3
A30
  Top 0.406: U11.A5 121.67,68.2 JP140.3
  Bottom 0.254: U11.A5 121.67,64.77 120.02,66.42 80.39,66.42 78.11,68.71 78.11,81.03 77.85,81.28 73.79,81.28 73.41,81.66 SJ12.3
A31
  Top 0.406: U11.A4 119.13,68.2 JP139.3
  Bottom 0.254: U11.A4 119.13,64.52 117.86,65.79 79.76,65.79 77.6,67.94 69.98,67.94 69.34,68.58 SJ11.3
A32
  Top 0.406: U11.A2 114.05,68.2 JP137.3
A33
  Top 0.406: U11.A1 111.51,68.2 JP136.3
A34
  Top 0.406: U11.A0 108.97,68.2 JP135.3
A35
  Top 0.406: U11.A3 116.59,68.2 JP138.3
A36
  Top 0.406: U13.A5 181.86,68.2 JP164.3
  Bottom 0.254: U13.A5 181.86,64.77 180.21,66.42 140.59,66.42 138.3,68.71 138.3,81.03 138.05,81.28 133.99,81.28 133.6,81.66 SJ14.3
A37
  Top 0.406: U13.A4 179.32,68.2 JP163.3
  Bottom 0.254: U13.A4 179.32,64.52 178.05,65.79 139.95,65.79 137.79,67.94 130.18,67.94 129.54,68.58 SJ13.3
A38
  Top 0.406: U13.A2 174.24,68.2 JP161.3
A39
  Top 0.406: U13.A1 171.7,68.2 JP160.3
A40
  Top 0.406: U13.A0 169.16,68.2 JP159.3
A41
  Top 0.406: U13.A3 176.78,68.2 JP162.3
A42
  Top 0.406: U15.A5 242.06,68.2 JP188.3
  Bottom 0.254: U15.A5 242.06,64.77 240.41,66.42 200.79,66.42 198.5,68.71 198.5,81.03 198.25,81.28 194.18,81.28 193.8,81.66 SJ16.3
A43
  Top 0.406: U15.A4 239.52,68.2 JP187.3
  Bottom 0.254: U15.A4 239.52,64.52 238.25,65.79 200.15,65.79 197.99,67.94 190.37,67.94 189.74,68.58 SJ15.3
A44
  Top 0.406: U15.A2 234.44,68.2 JP185.3
A45
  Top 0.406: U15.A1 231.9,68.2 JP184.3
A46
  Top 0.406: U15.A0 229.36,68.2 JP183.3
A47
  Top 0.406: U15.A3 236.98,68.2 JP186.3
AIN1  (via drill 0.51)
  Top 0.203: U1.D4 51.31,52.7 JP4.3 51.31,52.58 52.58,51.31 v52.58,45.34 51.69,45.34 45.87,39.52 U2.21
  Bottom 0.203: v52.58,45.34 59.82,45.34 TP1.P$1
AIN2  (via drill 0.51)
  Top 0.203: U1.D5 48.77,52.7 JP5.3 48.77,52.58 50.04,51.31 v50.04,45.34 45.22,40.52 U2.22
  Bottom 0.203: TP2.P$1 58.17,44.45 50.93,44.45 v50.04,45.34
AIN3  (via drill 0.51)
  Top 0.203: U3.D5 108.97,52.7 JP30.3 108.97,52.58 110.24,51.31 v110.24,45.34 105.42,40.52 U4.22
  Bottom 0.203: TP12.P$1 118.36,44.45 111.12,44.45 v110.24,45.34
AIN4  (via drill 0.51)
  Top 0.203: U3.D4 111.51,52.7 JP29.3 111.51,52.58 112.78,51.31 v112.78,45.34 111.89,45.34 106.07,39.52 U4.21
  Bottom 0.203: v112.78,45.34 120.02,45.34 TP13.P$1
AIN5  (via drill 0.51)
  Top 0.203: U5.D5 169.16,52.7 JP54.3 169.16,52.58 170.43,51.31 v170.43,45.34 165.62,40.52 U6.22
  Bottom 0.203: TP23.P$1 178.56,44.45 171.32,44.45 v170.43,45.34
AIN6  (via drill 0.51)
  Top 0.203: U5.D4 171.7,52.7 JP53.3 171.7,52.58 172.97,51.31 v172.97,45.34 172.09,45.34 166.27,39.52 U6.21
  Bottom 0.203: v172.97,45.34 180.21,45.34 TP24.P$1
AIN7  (via drill 0.51)
  Top 0.203: U7.D5 229.36,52.7 JP78.3 229.36,52.58 230.63,51.31 v230.63,45.34 225.82,40.52 U8.22
  Bottom 0.203: TP34.P$1 238.76,44.45 231.52,44.45 v230.63,45.34
AIN8  (via drill 0.51)
  Top 0.203: U7.D4 231.9,52.7 JP77.3 231.9,52.58 233.17,51.31 v233.17,45.34 232.28,45.34 226.47,39.52 U8.21
  Bottom 0.203: v233.17,45.34 240.41,45.34 TP35.P$1
AIN9  (via drill 0.51)
  Top 0.203: U9.D5 48.77,106.55 JP102.3 48.77,106.43 50.04,105.16 v50.04,99.19 45.22,94.37 U10.22
  Bottom 0.203: TP45.P$1 58.17,98.3 50.93,98.3 v50.04,99.19
AIN10  (via drill 0.51)
  Top 0.203: U9.D4 51.31,106.55 JP101.3 51.31,106.43 52.58,105.16 v52.58,99.19 51.69,99.19 45.87,93.37 U10.21
  Bottom 0.203: v52.58,99.19 59.82,99.19 TP46.P$1
AIN11  (via drill 0.51)
  Top 0.203: U11.D5 108.97,106.55 JP126.3 108.97,106.43 110.24,105.16 v110.24,99.19 105.42,94.37 U12.22
  Bottom 0.203: TP56.P$1 118.36,98.3 111.12,98.3 v110.24,99.19
AIN12  (via drill 0.51)
  Top 0.203: U11.D4 111.51,106.55 JP125.3 111.51,106.43 112.78,105.16 v112.78,99.19 111.89,99.19 106.07,93.37 U12.21
  Bottom 0.203: v112.78,99.19 120.02,99.19 TP57.P$1
AIN13  (via drill 0.51)
  Top 0.203: U13.D5 169.16,106.55 JP150.3 169.16,106.43 170.43,105.16 v170.43,99.19 165.62,94.37 U14.22
  Bottom 0.203: TP67.P$1 178.56,98.3 171.32,98.3 v170.43,99.19
AIN14  (via drill 0.51)
  Top 0.203: U13.D4 171.7,106.55 JP149.3 171.7,106.43 172.97,105.16 v172.97,99.19 172.09,99.19 166.27,93.37 U14.21
  Bottom 0.203: v172.97,99.19 180.21,99.19 TP68.P$1
AIN15  (via drill 0.51)
  Top 0.203: U15.D5 229.36,106.55 JP174.3 229.36,106.43 230.63,105.16 v230.63,99.19 225.82,94.37 U16.22
  Bottom 0.203: TP78.P$1 238.76,98.3 231.52,98.3 v230.63,99.19
AIN16  (via drill 0.51)
  Top 0.203: U15.D4 231.9,106.55 JP173.3 231.9,106.43 233.17,105.16 v233.17,99.19 232.28,99.19 226.47,93.37 U16.21
  Bottom 0.203: v233.17,99.19 240.41,99.19 TP79.P$1
ANALOG_PWR_RAIL
  Top 0.406: JP19.2 JP18.2 JP17.2 JP16.2 JP15.2 JP14.2 47.5,17.02 46.86,17.65 46.86,20.7 46.48,21.08 S1.2
ANALOG_PWR_RAIL1
  Top 0.406: JP44.2 JP43.2 JP42.2 JP41.2 JP40.2 JP39.2 107.7,17.02 107.06,17.65 107.06,20.7 106.68,21.08 S5.2
ANALOG_PWR_RAIL2
  Top 0.406: JP68.2 JP67.2 JP66.2 JP65.2 JP64.2 JP63.2 167.89,17.02 167.26,17.65 167.26,20.7 166.88,21.08 S8.2
ANALOG_PWR_RAIL3
  Top 0.406: JP92.2 JP91.2 JP90.2 JP89.2 JP88.2 JP87.2 228.09,17.02 227.46,17.65 227.46,20.7 227.08,21.08 S11.2
ANALOG_PWR_RAIL4
  Top 0.406: JP116.2 JP115.2 JP114.2 JP113.2 JP112.2 JP111.2 47.5,70.87 46.86,71.5 46.86,74.55 46.48,74.93 S14.2
ANALOG_PWR_RAIL5
  Top 0.406: JP140.2 JP139.2 JP138.2 JP137.2 JP136.2 JP135.2 107.7,70.87 107.06,71.5 107.06,74.55 106.68,74.93 S17.2
ANALOG_PWR_RAIL6
  Top 0.406: JP164.2 JP163.2 JP162.2 JP161.2 JP160.2 JP159.2 167.89,70.87 167.26,71.5 167.26,74.55 166.88,74.93 S20.2
ANALOG_PWR_RAIL7
  Top 0.406: JP188.2 JP187.2 JP186.2 JP185.2 JP184.2 JP183.2 228.09,70.87 227.46,71.5 227.46,74.55 227.08,74.93 S23.2
AOUT1
  Top 0.254: 62.1,25.69 R1.2
  Top 0.406: R1.2 R2.2 62.32,28.87 61.47,29.72 JP21.4 JP23.4 53.85,29.72 51.31,27.18 44.96,27.18 44.57,27.56 U2.2 U2.1
AOUT2  (via drill 0.51)